# Altium PCB IR_SENSOR.PcbDoc
Units mm, origin at the board's own origin, x right, y up, seen from the top; angles counter-clockwise.
Board outline 37.59 x 33.02 mm, 2 copper layers (Top Layer, Bottom Layer); 9 components, 7 nets, 30 pads, 0 vias.
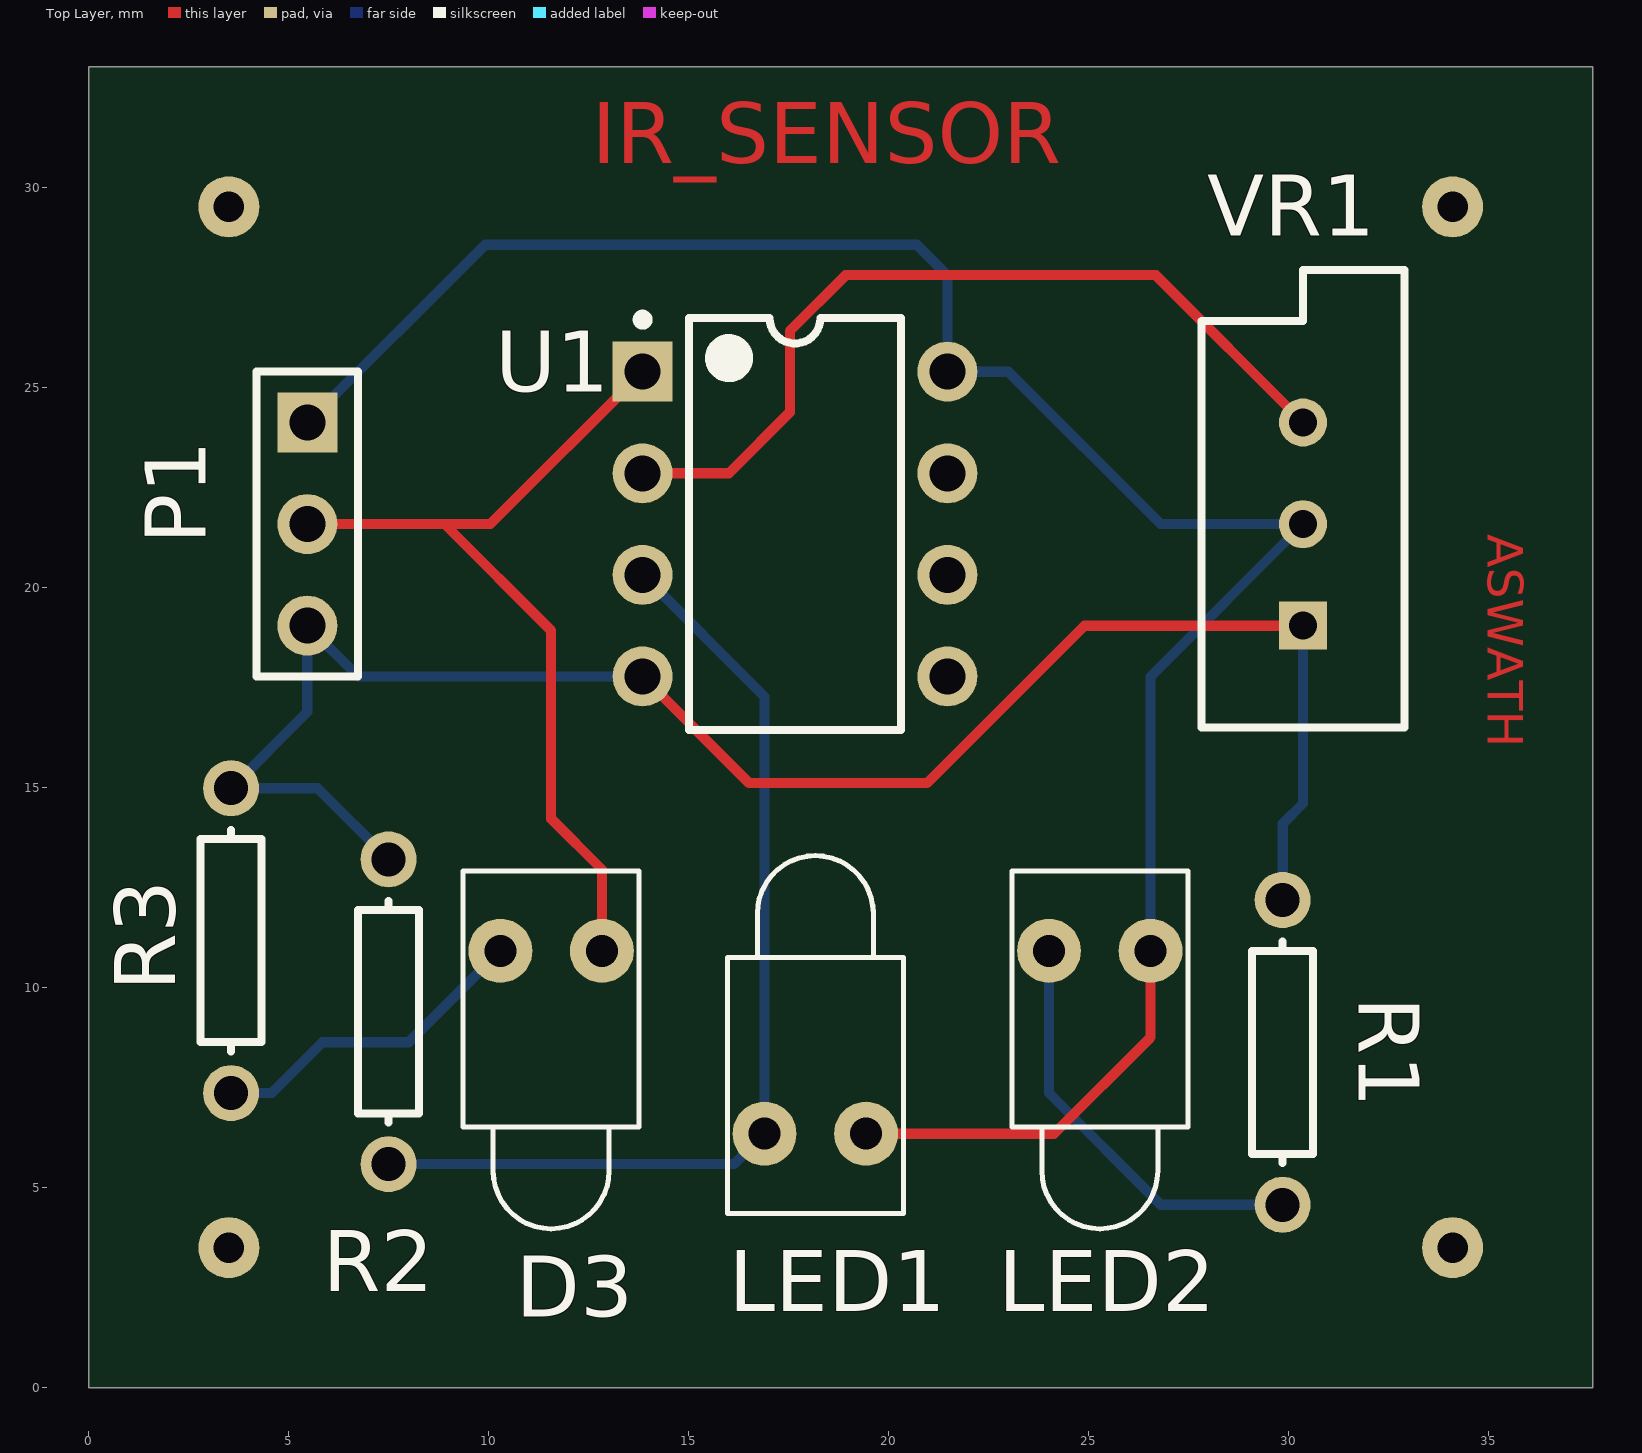
[diagram p0: Top Layer view]
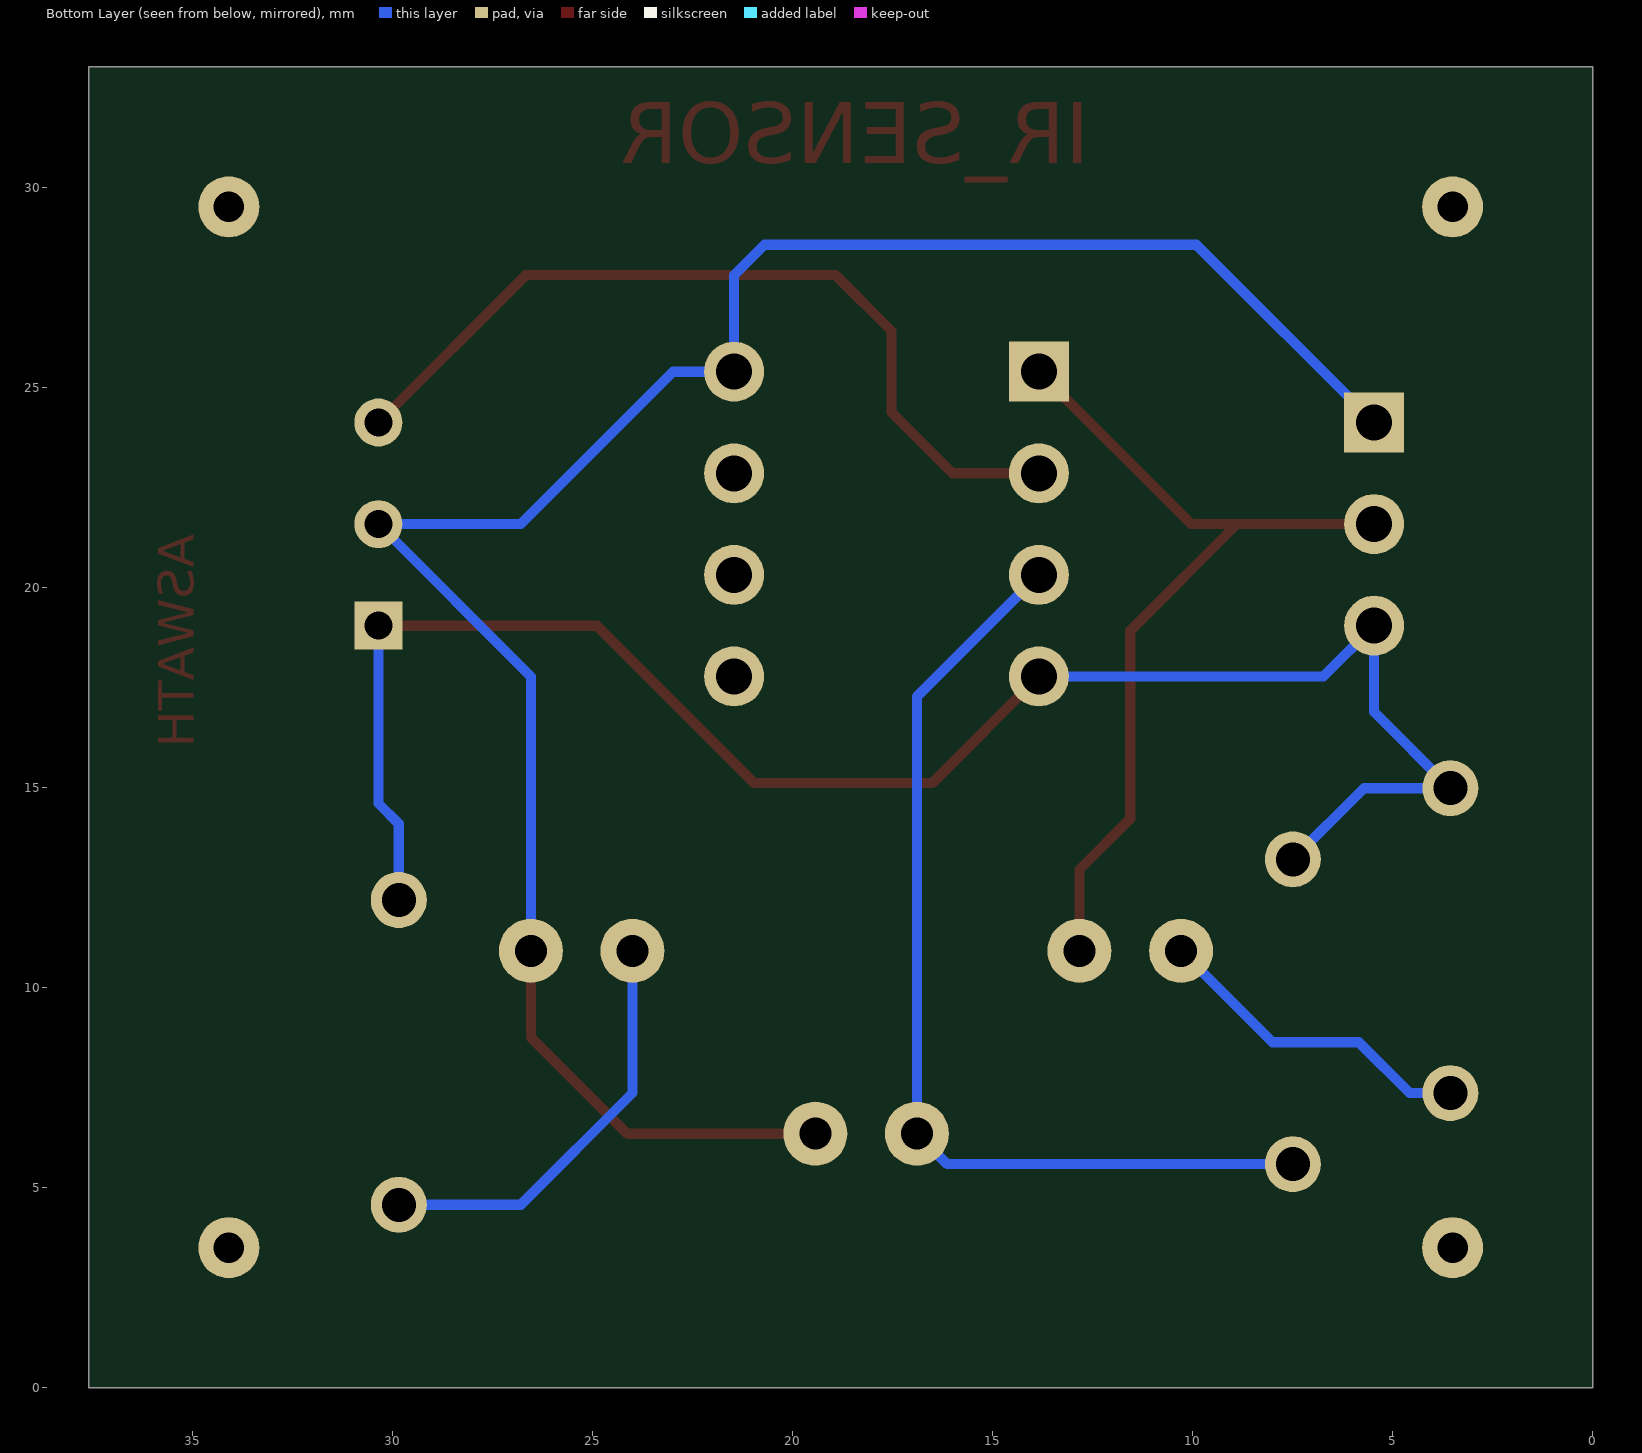
[diagram p1: Bottom Layer view, seen from below]

## Layer stack, top to bottom
Top Layer: signal copper 0.0356
Dielectric: dielectric 0.32, FR-4, Dk 4.8
Bottom Layer: signal copper 0.0356

## Board outline
0,0 37.592,0 37.592,33.02 0,33.02

## Design rules (kind name [scope] priority, off if disabled: settings)
Clearance [All] p1: gap=0.254
PolygonConnect [All] p1: connectstyle=Relief reliefconductorwidth=0.254 reliefentries=4 polygonreliefangle="90 Angle"
RoutingVias [All] p1: holewidth=0.711 width=1.27 viastyle="Through Hole" minholewidth=0.711 minwidth=1.27 maxholewidth=0.711 maxwidth=1.27
SilkscreenOverComponentPads [All] p1: minsilkscreentomaskgap=0.254
SolderMaskExpansion [All] p1: expansion=0.102
Width [All] p1: maxlimit=0.254 minlimit=0.254 preferedwidth=0.254
27 further rules are at their usual default settings.

## Components (designator, comment, footprint, x,y, rotation, side; value= is the part's Value field where it differs from the comment)
D3 "LED Rx" LED-1 11.557,10.922 r270 top
LED1 "LED Rx" LED-1 18.161,6.35 r90 top
LED2 "LED_Tx" LED-1 25.273,10.922 r270 top
P1 "Header 3" HDR1X3 5.461,24.13 r270 top
R1 "#NAME?" AXIAL-0.3 29.845,8.382 r270 top
R2 "Res1" AXIAL-0.3 7.493,9.398 r270 top
R3 "Resistor_THT" AXIAL-0.3 3.556,11.176 r90 top
U1 "LM358AN" N08E 17.653,21.59 r0 top
VR1 "VR1" VR5 30.353,21.59 r90 top

## Footprints (in the part's own frame and the unit in brackets; to place one, negate y for a bottom-side part, rotate by r counter-clockwise, add the part's x,y. Pads: shape width x height; smd on the part's side, far side on the other; paste and mask are expansions set on the pad)
AXIAL-0.3 [mm] "Axial Device, Thru-Hole; 2 Leads; 0.3 in Pin Spacing"
  round 1.4 hole 0.85: 1(-3.81,0) 2(3.81,0)
  silkscreen extent -2.77,-0.76 2.77,0.76
HDR1X3 [mm] "Connector; Header; 3 Position"
  rect 1.5x1.5 hole 0.9: 1(0,0)
  round 1.5 hole 0.9: 2(2.54,0) 3(5.08,0)
  silkscreen extent -1.27,-1.27 6.35,1.27
LED-1 [mm] "Typical RED GaAs LED; 2 Leads"
  round 1.6 hole 0.8: 1(0,1.27) 2(0,-1.27)
  silkscreen extent -2,-2.2 6.95,2.2
N08E [mm] "DIP, 8-Leads, Row Spacing 7.62mm, Pitch 2.54mm, Body 9.91x6.35mm"
  rect 1.5x1.5 hole 0.9: 1(-3.81,3.81)
  round 1.5 hole 0.9: 2(-3.81,1.27) 3(-3.81,-1.27) 4(-3.81,-3.81) 5(3.81,-3.81) 6(3.81,-1.27) 7(3.81,1.27) 8(3.81,3.81)
  silkscreen extent -3.93,-5.15 2.65,5.23, body extent -3.6,-5.15 3.6,5.15, height 5.34
VR5 [mm] "Variable Resistor, Thru-Hole; 3 Leads"
  rect 1.2x1.2 hole 0.7: 1(-2.54,0)
  round 1.2 hole 0.7: 2(0,0) 3(2.54,0)
  silkscreen extent -5.08,-2.54 6.35,2.54

## Part data
D3 LED1 LED2: library part LED1, "Typical RED GaAs LED"
P1: "Header, 3-Pin"
R1 R3: library part Res1, "Resistor"
R2: "Resistor"
U1: "Low Power Dual Operational Amplifier"
VR1: library part RPot, "Potentiometer"

## Free pads (board coordinates)
  round 1.524 hole 0.762: 0(3.5,3.5) 0(3.5,29.52) 0(34.092,3.5) 0(34.092,29.52)

## Nets (pads, with @x,y where several pads share a name; then routed paths per layer and width w, separated by ;. In a path a pad name is that pad's centre, name@x,y a point inside that pad or via, vN(x,y) a via of type N, cw(c..) or ccw(c..) an arc to the next point about the centre after c; other vN are vias at no path point)
+5V: LED1.2 LED2.1 P1.1 U1.8 VR1.2 | length 53.6
  Top Layer w0.254: LED1.2 24.13,6.35 26.543,8.763 LED2.1
  Bottom Layer w0.254: P1.1 9.906,28.575 20.701,28.575 21.463,27.813 U1.8 22.987,25.4 26.797,21.59 VR1.2 26.543,17.78 LED2.1
GND: P1.3 R1.1 R2.1 R3.2 U1.4 VR1.1 | length 44.7
  Top Layer w0.254: U1.4 16.51,15.113 20.955,15.113 24.892,19.05 VR1.1
  Bottom Layer w0.254: R2.1 5.715,14.986 R3.2 5.461,16.891 P1.3 6.731,17.78 U1.4 ; R1.1 29.845,14.097 30.353,14.605 VR1.1
NetD3_1: D3.1 P1.2 U1.1 | length 22.3
  Top Layer w0.254: P1.2 8.89,21.59 ; D3.1 12.827,12.954 11.557,14.224 11.557,18.923 8.89,21.59 ; U1.1 10.033,21.59 8.89,21.59
NetD3_2: D3.2 R3.1 | length 8.2
  Bottom Layer w0.254: R3.1 4.572,7.366 5.842,8.636 8.001,8.636 D3.2
NetLED1_1: LED1.1 R2.2 U1.3 | length 24.9
  Bottom Layer w0.254: R2.2 16.129,5.588 LED1.1 16.891,17.272 U1.3
NetLED2_2: LED2.2 R1.2 | length 10.6
  Bottom Layer w0.254: LED2.2 24.003,7.366 26.797,4.572 R1.2
NetU1_2: U1.2 VR1.3 | length 21.3
  Top Layer w0.254: U1.2 16.002,22.86 17.526,24.384 17.526,26.416 18.923,27.813 26.67,27.813 VR1.3
pads on no net: U1.5 U1.6 U1.7

## Other copper
Top Layer:
  text "IR_SENSOR" at 12.573,30.607 h1.52
  text "ASWATH" at 34.671,21.336 h1.52 r270

## Silkscreen, mask and mechanical layers (free items; w line width, h text height)
Mechanical 1:
  the board outline again, w0.254